# EAGLE board 00A-024 FRDM Protoboard (EAGLE 6.3)
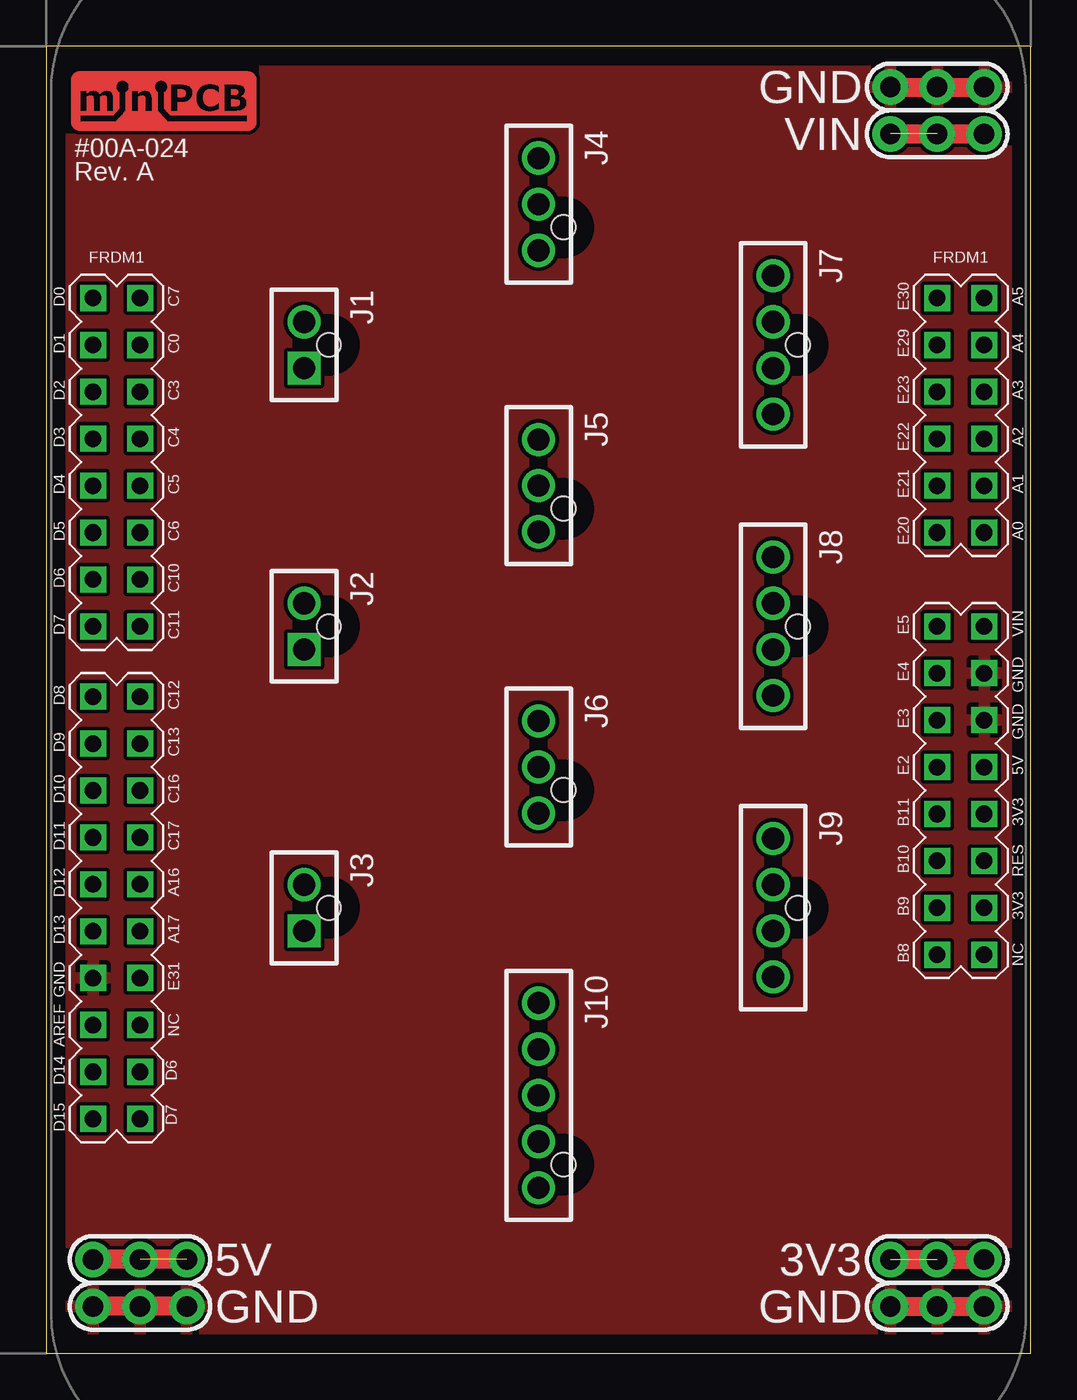
[diagram p0: board, top side]
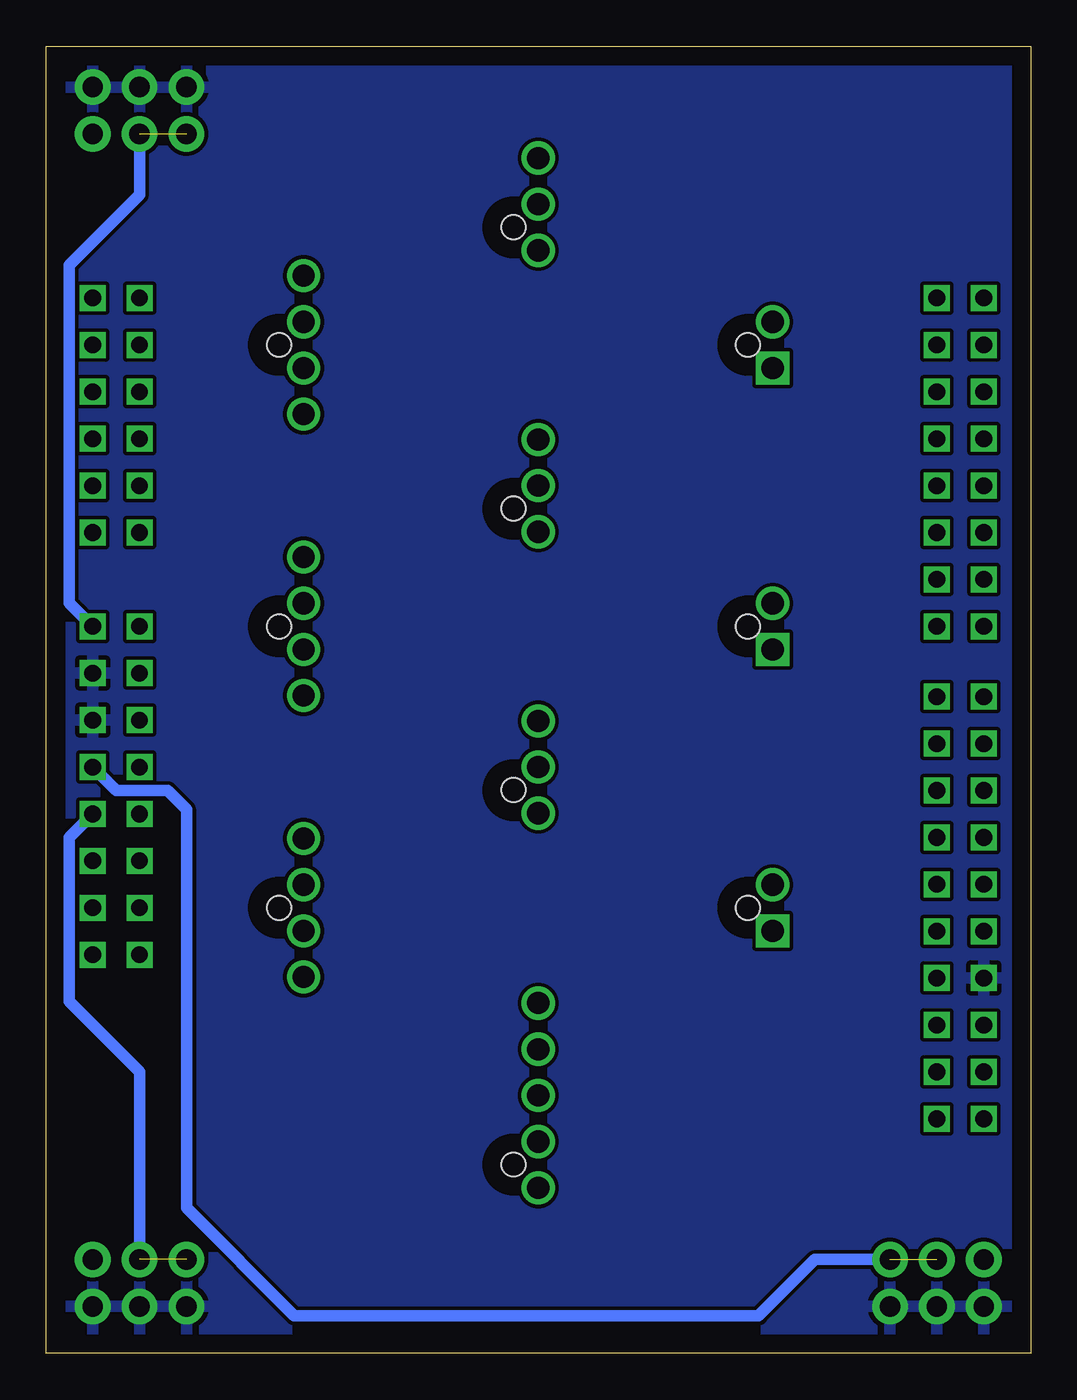
[diagram p1: board, bottom side, seen from below]

Size 53.32 x 70.79 mm. Coordinates in mm from the lower left corner, seen from the top.
Outline: 0,0 53.32,0 53.32,70.79 0,70.79 0,0
Copper layers (1*16): Top 0.035mm / dielectric 1.5mm / Bottom 0.035mm
Design rules "default": minimum track width 10mil, minimum drill 24mil, track to track 8mil, track to pad 8mil, pad to pad 8mil, via to via 8mil, smd to smd 8mil, copper to edge 40mil, drill to drill 8mil, minimum pad ring 10mil, minimum via ring 8mil, stop-mask expansion 4mil, vias tented up to drill 0mil, thermal gap 10mil

## Footprints (pad centres in the part's own frame; a part is rotated, then mirrored left to right if it is on the bottom)
FRDM_KL25Z_NORMAL = drill 0.9 square: 3V3 24.13,-15.24; 5V 24.13,-7.62; A0 24.13,5.08; A1 24.13,7.62; A2 24.13,10.16; A3 24.13,12.7; A4 24.13,15.24; A5 24.13,17.78; AREF -24.13,-21.59; D0 -24.13,17.78; D1 -24.13,15.24; D2 -24.13,12.7; D3 -24.13,10.16; D4 -24.13,7.62; D5 -24.13,5.08; D6 -24.13,2.54; D7 -24.13,0; D8 -24.13,-3.81; D9 -24.13,-6.35; D10 -24.13,-8.89; D11 -24.13,-11.43; D12 -24.13,-13.97; D13 -24.13,-16.51; D14 -24.13,-24.13; D15 -24.13,-26.67; GND0 24.13,-2.54; GND1 24.13,-5.08; GND2 -24.13,-19.05; NC1 24.13,-17.78; NC2 -21.59,-21.59; P3V3 24.13,-10.16; PTA16 -21.59,-13.97; PTA17 -21.59,-16.51; PTB8 21.59,-17.78; PTB9 21.59,-15.24; PTB10 21.59,-12.7; PTB11 21.59,-10.16; PTC0 -21.59,15.24; PTC3 -21.59,12.7; PTC4 -21.59,10.16; PTC5 -21.59,7.62; PTC6 -21.59,5.08; PTC7 -21.59,17.78; PTC10 -21.59,2.54; PTC11 -21.59,0; PTC12 -21.59,-3.81; PTC13 -21.59,-6.35; PTC16 -21.59,-8.89; PTC17 -21.59,-11.43; PTD6 -21.59,-24.13; PTD7 -21.59,-26.67; PTE2 21.59,-7.62; PTE3 21.59,-5.08; PTE4 21.59,-2.54; PTE5 21.59,0; PTE20 21.59,5.08; PTE21 21.59,7.62; PTE22 21.59,10.16; PTE23 21.59,12.7; PTE29 21.59,15.24; PTE30 21.59,17.78; PTE31 -21.59,-19.05; RESET 24.13,-12.7; VIN 24.13,0
PINS_2-NANOFIT = drill 1.2 square: 1 -1.25,0 | drill 1.2: 2 1.25,0 | hole 1.3: 0,-1.34
PINS_3-NANOFIT = drill 1.2: 1 -2.5,0; 2 0,0; 3 2.5,0 | hole 1.3: -1.25,-1.34
PINS_4-NANOFIT = drill 1.2: 1 -3.75,0; 2 -1.25,0; 3 1.25,0; 4 3.75,0 | hole 1.3: 0,-1.34
PINS_5-NANOFIT = drill 1.2: 1 -5,0; 2 -2.5,0; 3 0,0; 4 2.5,0; 5 5,0 | hole 1.3: -3.75,-1.34
PINS_1-3P_VALUE = drill 1.1 pad 1.93: 1 0,0; 2 2.54,0; 3 5.08,0

## Placement (x,y rotation side)
FRDM1  FRDM-KL25ZNORMAL  [FRDM_KL25Z_NORMAL]  26.67,39.37 0 top
J1  PINS_2-NANOFIT-105309-1102  [PINS_2-NANOFIT]  13.97,54.61 90 top
J2  PINS_2-NANOFIT-105309-1102  [PINS_2-NANOFIT]  13.97,39.37 90 top
J3  PINS_2-NANOFIT-105309-1102  [PINS_2-NANOFIT]  13.97,24.13 90 top
J4  PINS_3-NANOFIT-105309-1103  [PINS_3-NANOFIT]  26.67,62.23 90 top
J5  PINS_3-NANOFIT-105309-1103  [PINS_3-NANOFIT]  26.67,46.99 90 top
J6  PINS_3-NANOFIT-105309-1103  [PINS_3-NANOFIT]  26.67,31.75 90 top
J7  PINS_4105309-1104  [PINS_4-NANOFIT]  39.37,54.61 90 top
J8  PINS_4105309-1104  [PINS_4-NANOFIT]  39.37,39.37 90 top
J9  PINS_4105309-1104  [PINS_4-NANOFIT]  39.37,24.13 90 top
J10  PINS_5105309-1105  [PINS_5-NANOFIT]  26.67,13.97 90 top
P57  3V3  [PINS_1-3P_VALUE]  45.72,5.08 0 top
P58  5V  [PINS_1-3P_VALUE]  7.62,5.08 180 top
P59  VIN  [PINS_1-3P_VALUE]  45.72,66.04 0 top
P102  GND  [PINS_1-3P_VALUE]  45.72,2.54 0 top
P103  GND  [PINS_1-3P_VALUE]  7.62,2.54 180 top
P114  GND  [PINS_1-3P_VALUE]  45.72,68.58 0 top
U$1  MINIPCB_LOGO  [MINIPCB-LOGO]  6.35,67.82 0 top

## Library data of the parts
FRDM1 = nolan; AVAILABILITY: In Stock; DESCRIPTION: KL1x, KL2x, mbed-Enabled Development Freedom Kinetis ARM® Cortex®-M0+ MCU 32-Bit Embedded Evaluation Board; MF: NXP USA; MP: FRDM-KL25Z; PACKAGE: 0805 Freescale Semiconductor; PRICE: None; PURCHASE-URL: https://pricing.snapeda.com/search/part/FRDM-KL25Z/?ref=eda
J1-J10 P57-P59 P102 P103 P114 U$1 = nolan

## Nets
GND: FRDM1.GND0 FRDM1.GND1 FRDM1.GND2 P102.1 P102.2 P102.3 P103.1 P103.2 P103.3 P114.1 P114.2 P114.3
N$57: FRDM1.P3V3 P57.1 P57.2 P57.3
N$58: FRDM1.5V P58.1 P58.2 P58.3
N$59: FRDM1.VIN P59.1 P59.2 P59.3

## Tracks (layer width: path | path; a pad name or v marks a point on that pad's centre or on a via)
GND
  pour Top: 1.27,1.27 52.07,1.27 52.07,69.85 1.27,69.85
  pour Bottom: 1.27,1.27 52.07,1.27 52.07,69.85 1.27,69.85
N$57  (1 unrouted)
  Bottom 0.61: FRDM1.P3V3 52.07,27.94 52.07,19.05 48.26,15.24 P57.2
N$58  (1 unrouted)
  Bottom 0.61: FRDM1.5V 49.53,30.48 46.74,30.48 45.72,29.46 45.72,7.87 39.88,2.03 14.73,2.03 11.68,5.08 P58.1
N$59  (1 unrouted)
  Bottom 0.61: FRDM1.VIN 52.07,40.64 52.07,58.93 48.26,62.74 P59.2

## Text on the board
tPlace: #00A-024 | Rev. A